# EAGLE board stamp-control (EAGLE 5.12)

Size 55.88 x 66.04 mm. Coordinates in mm from the lower left corner, seen from the top.
Outline: 0,0 55.88,0 55.88,66.04 0,66.04 0,0
Copper layers (1*16): Top 0.035mm / dielectric 1.5mm / Bottom 0.035mm
Design rules "default": minimum track width 10mil, minimum drill 24mil, track to track 8mil, track to pad 8mil, pad to pad 8mil, via to via 8mil, smd to smd 8mil, copper to edge 40mil, drill to drill 8mil, minimum pad ring 10mil, minimum via ring 8mil, stop-mask expansion 4mil, vias tented up to drill 0mil, thermal gap 10mil
Net classes: 0 default: width 0.1 mm, drill 0.1 mm, clearance 0.1 mm

## Footprints (pad centres in the part's own frame; a part is rotated, then mirrored left to right if it is on the bottom)
C0603 = smd 0.8 x 0.8: 1 -0.762,0; 2 0.762,0
TQFP100 = smd 1.5 x 0.35: 1 -8,6; 2 -8,5.5; 3 -8,5; 4 -8,4.5; 5 -8,4; 6 -8,3.5; 7 -8,3; 8 -8,2.5; 9 -8,2; 10 -8,1.5; 11 -8,1; 12 -8,0.5; 13 -8,0; 14 -8,-0.5; 15 -8,-1; 16 -8,-1.5; 17 -8,-2; 18 -8,-2.5; 19 -8,-3; 20 -8,-3.5; 21 -8,-4; 22 -8,-4.5; 23 -8,-5; 24 -8,-5.5; 25 -8,-6; 51 8,-6; 52 8,-5.5; 53 8,-5; 54 8,-4.5; 55 8,-4; 56 8,-3.5; 57 8,-3; 58 8,-2.5; 59 8,-2; 60 8,-1.5; 61 8,-1; 62 8,-0.5; 63 8,0; 64 8,0.5; 65 8,1; 66 8,1.5; 67 8,2; 68 8,2.5; 69 8,3; 70 8,3.5; 71 8,4; 72 8,4.5; 73 8,5; 74 8,5.5; 75 8,6 | smd 0.35 x 1.5: 26 -6,-8; 27 -5.5,-8; 28 -5,-8; 29 -4.5,-8; 30 -4,-8; 31 -3.5,-8; 32 -3,-8; 33 -2.5,-8; 34 -2,-8; 35 -1.5,-8; 36 -1,-8; 37 -0.5,-8; 38 0,-8; 39 0.5,-8; 40 1,-8; 41 1.5,-8; 42 2,-8; 43 2.5,-8; 44 3,-8; 45 3.5,-8; 46 4,-8; 47 4.5,-8; 48 5,-8; 49 5.5,-8; 50 6,-8; 76 6,8; 77 5.5,8; 78 5,8; 79 4.5,8; 80 4,8; 81 3.5,8; 82 3,8; 83 2.5,8; 84 2,8; 85 1.5,8; 86 1,8; 87 0.5,8; 88 0,8; 89 -0.5,8; 90 -1,8; 91 -1.5,8; 92 -2,8; 93 -2.5,8; 94 -3,8; 95 -3.5,8; 96 -4,8; 97 -4.5,8; 98 -5,8; 99 -5.5,8; 100 -6,8
SOT23 = smd 1 x 1.4: 1 -0.95,-1.1; 2 0.95,-1.1; 3 0,1.1
SO08 = smd 0.66 x 2.032: 1 -1.905,-3.073; 2 -0.635,-3.073; 3 0.635,-3.073; 4 1.905,-3.073; 5 1.905,3.073; 6 0.635,3.073; 7 -0.635,3.073; 8 -1.905,3.073
1X02M = drill 0.9 square: 1 -1,0 | drill 0.9 round: 2 1,0
NOKIA1202LCD-EXT = smd 0.32 x 2.6: 0 -10.09,23.114; 11 -3.49,23.114 | smd 0.32 x 2.4: 1 -9.49,23.114; 2 -8.89,23.114; 3 -8.29,23.114; 4 -7.69,23.114; 5 -7.09,23.114; 6 -6.49,23.114; 7 -5.89,23.114; 8 -5.29,23.114; 9 -4.69,23.114; 10 -4.09,23.114
TC26H = drill 0.813 round: 1 -1.27,0; 2 1.27,0
HC49/S = drill 0.813 round: 1 -2.413,0; 2 2.413,0
R0603 = smd 0.8 x 0.8: 1 -0.762,0; 2 0.762,0
TF-PULL = smd 0.7 x 1.4: 1 -2.2,-7.62; 2 -1.1,-7.62; 3 0,-7.62; 4 1.1,-7.62; 5 2.2,-7.62; 6 3.3,-7.62; 7 4.4,-7.62; 8 5.5,-7.62; 9 6.6,-7.62 | smd 1.4 x 2: S1 -7.9,2.85; S2 7.9,2.85 | smd 1.28 x 1.4: S3 7.96,-6.75 | smd 1.95 x 1.4: S4 -7.025,-6.75 | hole 1.25: -3.1,3.25; 4.9,3.25
MA20-2 = drill 1.016 octagon: 1 -24.13,-1.27; 2 -24.13,1.27; 3 -21.59,-1.27; 4 -21.59,1.27; 5 -19.05,-1.27; 6 -19.05,1.27; 7 -16.51,-1.27; 8 -16.51,1.27; 9 -13.97,-1.27; 10 -13.97,1.27; 11 -11.43,-1.27; 12 -11.43,1.27; 13 -8.89,-1.27; 14 -8.89,1.27; 15 -6.35,-1.27; 16 -6.35,1.27; 17 -3.81,-1.27; 18 -3.81,1.27; 19 -1.27,-1.27; 20 -1.27,1.27; 21 1.27,-1.27; 22 1.27,1.27; 23 3.81,-1.27; 24 3.81,1.27; 25 6.35,-1.27; 26 6.35,1.27; 27 8.89,-1.27; 28 8.89,1.27; 29 11.43,-1.27; 30 11.43,1.27; 31 13.97,-1.27; 32 13.97,1.27; 33 16.51,-1.27; 34 16.51,1.27; 35 19.05,-1.27; 36 19.05,1.27; 37 21.59,-1.27; 38 21.59,1.27; 39 24.13,-1.27; 40 24.13,1.27
KSS-2EG4430 = smd 1.6 x 1.4: 1 -3.75,0; 2 3.75,0
NOKIA_JOY = smd 2 x 0.8 rotated 45: 1 -4.243,-1.414; 2 -2.828,-2.828; 3 -1.414,-4.243; 4 4.243,1.414; 5 2.828,2.828; 6 1.414,4.243 | smd 2 x 0.8 rotated 135: S1 -2.828,2.828; S2 2.828,-2.828
JTAG_2X05M-JTAG = drill 0.914 square: 1 -4,-0.8 | drill 0.914 round: 2 -4,1.2; 3 -2,-1.2; 4 -2,0.8; 5 0,-0.8; 6 0,1.2; 7 2,-1.2; 8 2,0.8; 9 4,-0.8; 10 4,1.2

## Placement (x,y rotation side)
C1  10pF  [C0603]  97.79,95.25 90 top  (outside the outline)
C2  10pF  [C0603]  97.79,91.44 90 top  (outside the outline)
C3  22pF  [C0603]  97.79,87.63 90 top  (outside the outline)
C4  22pF  [C0603]  97.79,83.82 90 top  (outside the outline)
C5  0.1  [C0603]  32.38,80.01 0 top  (outside the outline)
C6  0.1  [C0603]  28.57,80.01 0 top  (outside the outline)
C7  0.1  [C0603]  24.77,80.01 0 top  (outside the outline)
C8  0.1  [C0603]  20.95,80.01 0 top  (outside the outline)
C9  0.1  [C0603]  17.14,80.01 0 top  (outside the outline)
C10  0.1  [C0603]  13.34,80.01 0 top  (outside the outline)
C11  0.1  [C0603]  9.53,80.01 0 top  (outside the outline)
C12  0.1  [C0603]  5.71,80.01 0 top  (outside the outline)
C21  0.1  [C0603]  59.05,87.63 0 top  (outside the outline)
IC1  STM32F103V  [TQFP100]  29.84,38.1 270 bottom
IC2  MCP120/130  [SOT23]  32.38,71.12 0 top  (outside the outline)
IC3  AT24C08S  [SO08]  7.62,41.91 90 bottom
JP1  [1X02M]  38.73,91.44 0 top  (outside the outline)
LCD1  [NOKIA1202LCD-EXT]  34.29,32.38 0 top
Q1  32768Hz  [TC26H]  12.7,49.53 90 top
Q2  8MHz  [HC49/S]  8.26,54.61 0 top
Q3  MMBT2222  [SOT23]  40.64,78.74 0 top  (outside the outline)
R1  1M  [R0603]  10.79,49.53 90 bottom
R2  1M  [R0603]  8.26,54.61 0 bottom
R3  4.7K  [R0603]  47.62,87.63 0 top  (outside the outline)
R4  4.7K  [R0603]  43.81,87.63 0 top  (outside the outline)
R5  2.2K  [R0603]  40.01,87.63 0 top  (outside the outline)
R6  4.7K  [R0603]  36.2,87.63 0 top  (outside the outline)
R7  10  [R0603]  32.38,87.63 0 top  (outside the outline)
R8  4.7K  [R0603]  28.57,87.63 0 top  (outside the outline)
R9  2K  [R0603]  24.77,87.63 0 top  (outside the outline)
R10  4.7K  [R0603]  20.95,87.63 0 top  (outside the outline)
R11  4.7K  [R0603]  17.14,87.63 0 top  (outside the outline)
R12  4.7K  [R0603]  13.34,87.63 0 top  (outside the outline)
R13  4.7K  [R0603]  9.53,87.63 0 top  (outside the outline)
R14  4.7K  [R0603]  5.71,87.63 0 top  (outside the outline)
R15  4.7K  [R0603]  8.26,46.35 90 bottom
R16  4.7K  [R0603]  6.35,46.35 90 bottom
R17  4.7K  [R0603]  51.44,92.71 0 top  (outside the outline)
R20  4.7K  [R0603]  47.62,92.71 0 top  (outside the outline)
R21  4.7K  [R0603]  43.81,92.71 0 top  (outside the outline)
SD1  TF-HOLDER  [TF-PULL]  7.62,26.67 90 top
SV1  [MA20-2]  27.94,3.81 0 top
SV2  [MA20-2]  27.94,62.23 180 top
SW1  KSS-2EG4430  [KSS-2EG4430]  22.23,71.12 0 top  (outside the outline)
SW2  KSS-2EG4430  [KSS-2EG4430]  21.59,13.34 340 top
SW3  KSS-2EG4430  [KSS-2EG4430]  46.99,13.34 20 top
SW4  [NOKIA_JOY]  34.29,13.34 0 top
X1  [JTAG_2X05M-JTAG]  8.89,12.7 180 top

## Library data of the parts
C1-C12 C21 R1-R17 R20 R21 = rc-master-smd
IC1 X1 = stm32
IC2 = mcp120-130
IC3 = stm32-by-pb
JP1 = pinhead-fixdrills
LCD1 = lcd1202
Q1 Q2 = discrete
Q3 = semiconductor
SD1 = sd-mmc
SV1 SV2 = con-lstb
SW1-SW4 = buttons

## Nets
!CARD: R21.1 SD1.9
!LCD_CS: IC1.48 LCD1.2 R6.1
!MMC_CS: R20.1 SD1.2
!RESET: C10.1 IC1.14 IC2.1 LCD1.1 R3.1 R8.2 SW1.2 X1.4
+3V3: C5.1 C6.1 C7.1 C8.1 C9.1 C11.1 C12.1 C21.1 IC1.11 IC1.28 IC1.50 IC1.75 IC1.100 IC2.2 IC3.8 JP1.1 LCD1.6 LCD1.7 R3.2 R6.2 R7.2 R10.2 R11.2 R12.2 R13.2 R14.2 R15.2 R16.2 R20.2 R21.2 SD1.4 X1.1 X1.2
BL: R9.2
BOOT0: IC1.94 R4.1
GND: C1.2 C2.2 C3.2 C4.2 C5.2 C6.2 C7.2 C8.2 C9.2 C10.2 C11.2 C12.2 C21.2 IC1.10 IC1.27 IC1.49 IC1.74 IC1.99 IC2.3 IC3.1 IC3.2 IC3.3 IC3.4 IC3.7 LCD1.3 LCD1.8 Q3.2 R5.1 R8.1 R17.2 SD1.6 SD1.S1 SD1.S2 SD1.S3 SD1.S4 SW1.1 SW4.5 SW4.S1 SW4.S2 X1.8 X1.10
JTCK: IC1.76 X1.9
JTDI: IC1.77 X1.5
JTDO: IC1.89 X1.6
JTMS: IC1.72 X1.7
JTRST: IC1.90 X1.3
LCD_CLK: IC1.51 LCD1.5
LCD_DATA: IC1.47 LCD1.4
MISO1: SD1.7
MOSI1: SD1.3
N$1: Q3.1 R9.1
N$2: R10.1 SW4.2
N$3: R11.1 SW4.4
N$4: R12.1 SW4.3
N$5: JP1.2 R4.2 R5.2
N$6: R13.1 SW4.1
N$7: LCD1.9 Q3.3
N$8: LCD1.10 R7.1
N$9: R14.1 SW4.6
N$10: IC1.37
N$11: IC1.36 R17.1
OSC32_IN: C1.1 IC1.8 Q1.1 R1.2
OSC32_OUT: C2.1 IC1.9 Q1.2 R1.1
OSC_IN: C3.1 IC1.12 Q2.1 R2.2
OSC_OUT: C4.1 IC1.13 Q2.2 R2.1
SCL1: IC1.92 IC3.6 R16.1
SCLK1: SD1.5
SDA1: IC1.93 IC3.5 R15.1
VBAT: IC1.6
VDDA: IC1.22
VREF+: IC1.21
VREF-: IC1.20
VSSA: IC1.19

## Tracks (layer width: path | path; a pad name or v marks a point on that pad's centre or on a via)
!CARD  (1 unrouted)
!LCD_CS  (2 unrouted)
!MMC_CS  (1 unrouted)
!RESET  (7 unrouted)
+3V3  (32 unrouted)
BOOT0  (1 unrouted)
GND  (40 unrouted)
JTCK  (1 unrouted)
JTDI  (1 unrouted)
JTDO  (1 unrouted)
JTMS  (1 unrouted)
JTRST  (1 unrouted)
LCD_CLK  (1 unrouted)
LCD_DATA  (1 unrouted)
N$1  (1 unrouted)
N$2  (1 unrouted)
N$3  (1 unrouted)
N$4  (1 unrouted)
N$5  (2 unrouted)
N$6  (1 unrouted)
N$7  (1 unrouted)
N$8  (1 unrouted)
N$9  (1 unrouted)
N$11  (1 unrouted)
OSC32_IN  (3 unrouted)
OSC32_OUT  (3 unrouted)
OSC_IN  (3 unrouted)
OSC_OUT  (3 unrouted)
SCL1  (2 unrouted)
SDA1  (2 unrouted)